# Altium PCB PCB1.PcbDoc
Units mm, origin at the board's own origin, x right, y up, seen from the top; angles counter-clockwise.
Board outline 70 x 50 mm, 2 copper layers (Top Layer, Bottom Layer); 22 components, 18 nets, 59 pads, 0 vias.
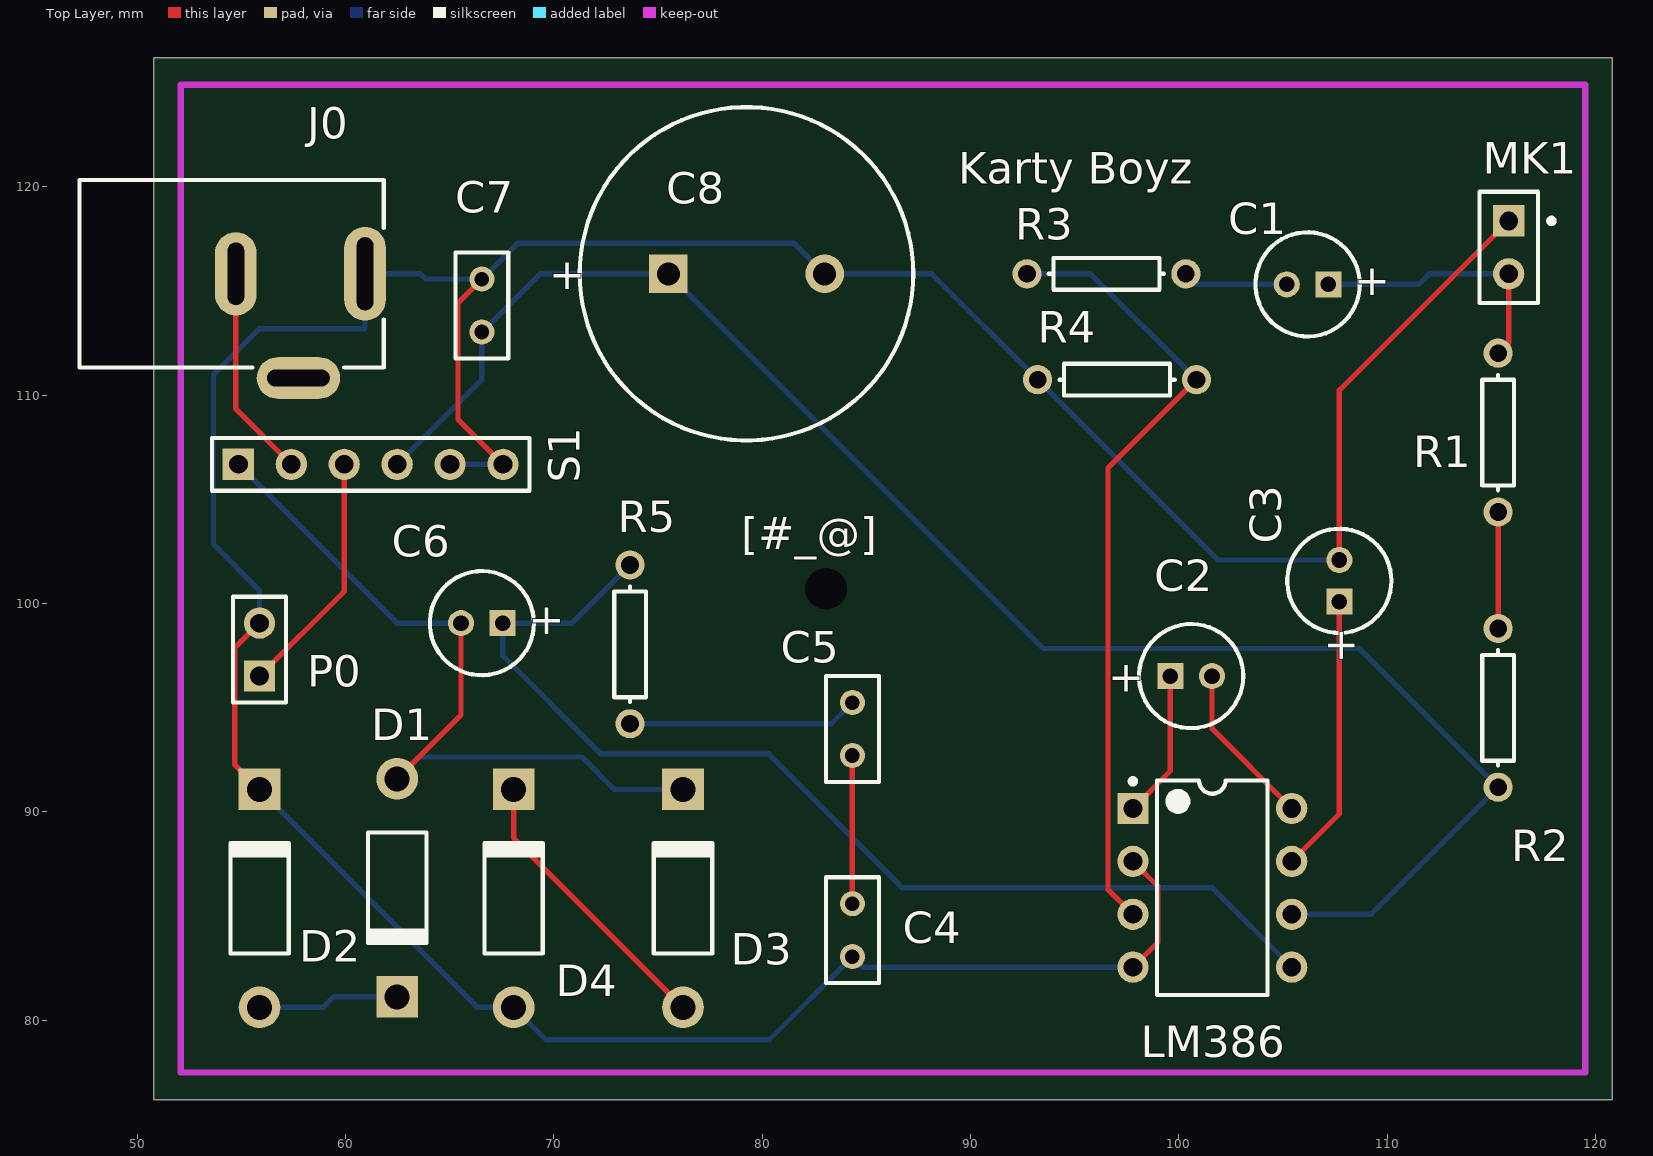
[diagram p0: Top Layer view]
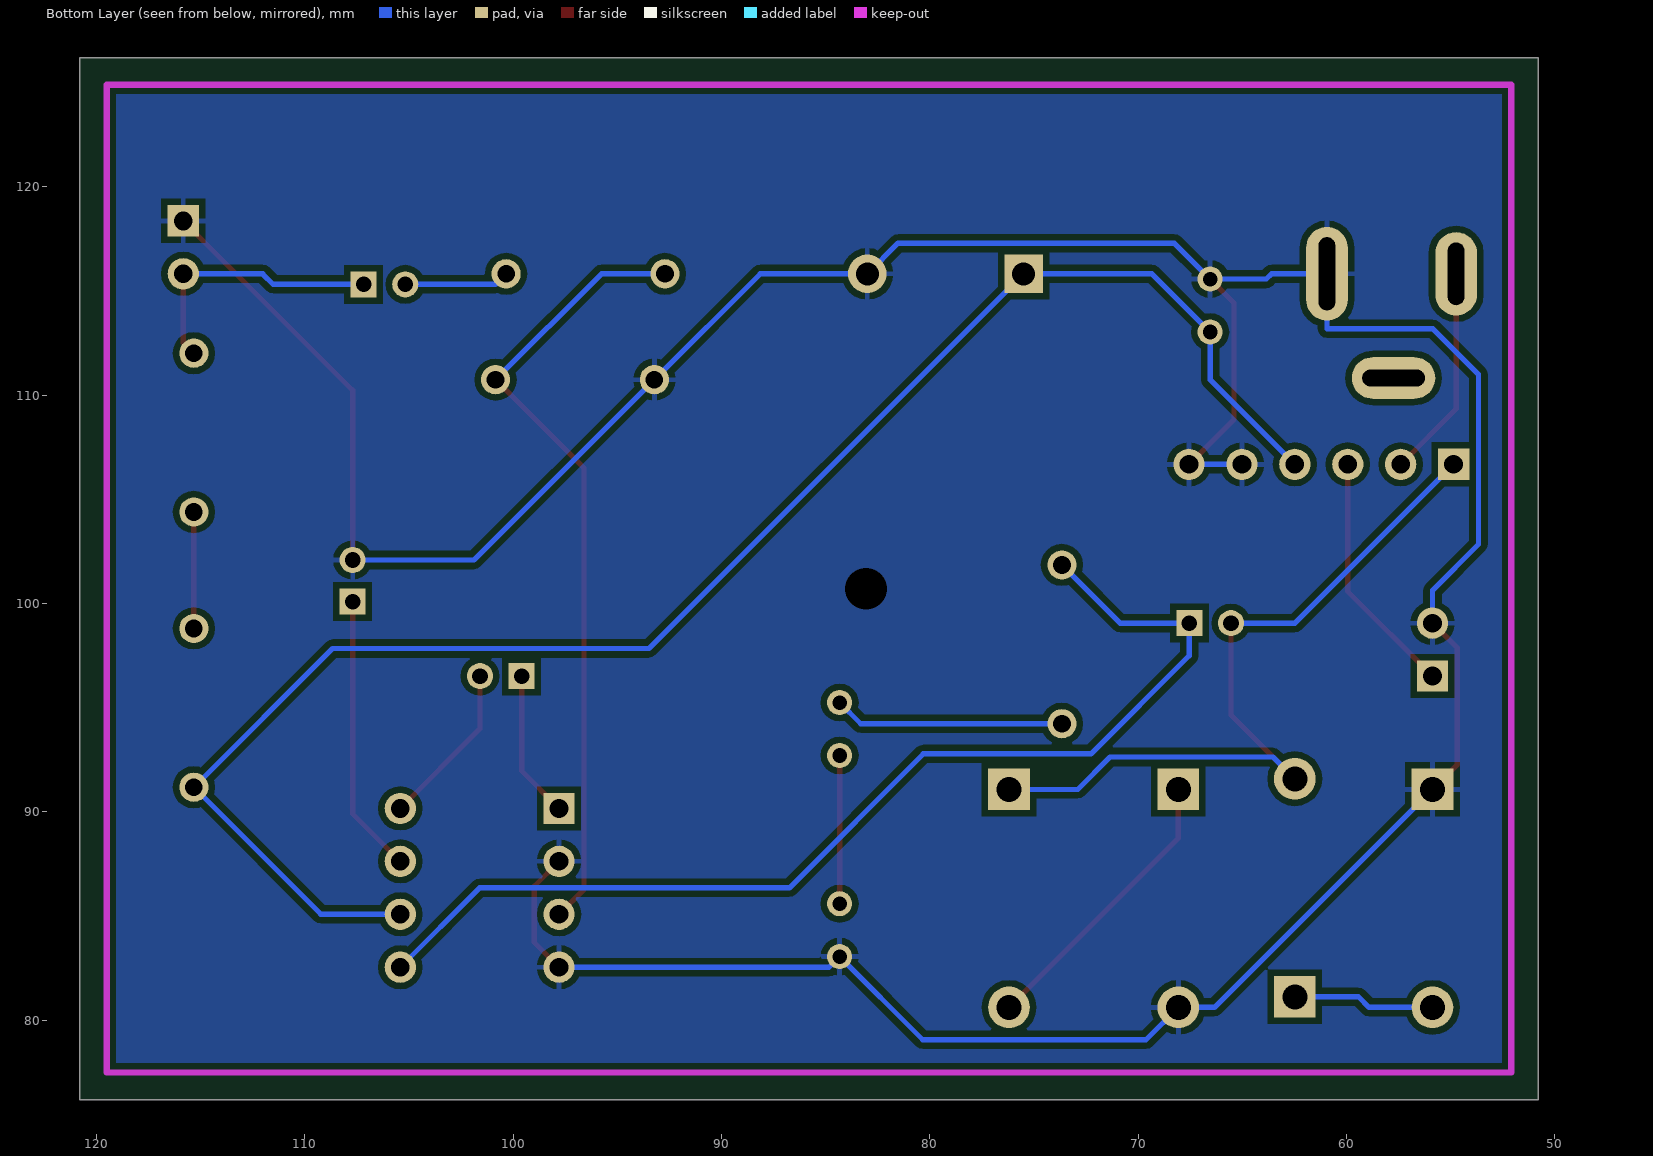
[diagram p1: Bottom Layer view, seen from below]

## Layer stack, top to bottom
Top Layer: signal copper 0.0356
Dielectric: core 0.32, FR-4, Dk 4.8
Bottom Layer: signal copper 0.0356

## Board outline
50.8,76.2 120.8,76.2 120.8,126.2 50.8,126.2

## Design rules (kind name [scope] priority, off if disabled: settings)
Clearance [All] p1: gap=0.3
PolygonConnect [All] p1: connectstyle=Relief reliefconductorwidth=0.254 reliefentries=4 polygonreliefangle="90 Angle"
RoutingVias [All] p1: holewidth=0.8 width=1.6 viastyle="Through Hole" minholewidth=0.711 minwidth=1.27 maxholewidth=0.711 maxwidth=1.27
SilkscreenOverComponentPads [All] p1: minsilkscreentomaskgap=0.254
SolderMaskExpansion [All] p1: expansion=0.102
Width Width_1 [All] p1: maxlimit=0.254 minlimit=0.254 preferedwidth=0.254
Width Width_pwr [(InNet('VCC') OR InNet('GND'))] p2: maxlimit=0.7 minlimit=0.3 preferedwidth=0.5 minimp=50.000000 maximp=50.000000 favimp=50.000000
27 further rules are at their usual default settings.

## Components (designator, comment, footprint, x,y, rotation, side; value= is the part's Value field where it differs from the comment)
C1 "" CAPPR2-5x6.8 106.172,115.316 r180 top
C2 "" CAPPR2-5x6.8 100.584,96.52 r0 top
C3 "" CAPPR2-5x6.8 107.696,101.092 r90 top
C4 "" RAD-0.1 84.328,84.328 r90 top
C5 "" RAD-0.1 84.328,93.98 r90 top
C6 "" CAPPR2-5x6.8 66.548,99.06 r180 top
C7 "" RAD-0.1 66.548,114.3 r270 top
C8 "" CAPPR7.5-16x35 79.248,115.824 r0 top
D1 "Diode 1N4007" DIO10.46-5.3x2.8 62.484,86.36 r270 top
D2 "Diode 1N4007" DIO10.46-5.3x2.8 55.88,85.852 r90 top
D3 "Diode 1N4007" DIO10.46-5.3x2.8 76.2,85.852 r90 top
D4 "Diode 1N4007" DIO10.46-5.3x2.8 68.072,85.852 r90 top
J0 "PWR2.1" KLD-0202 47.244,115.824 r0 top
LM386 "LM386N-3" N08E 101.6,86.36 r0 top (schematic designator MK1)
MK1 "Mic2" PIN2 115.824,118.364 r270 top (schematic designator P0)
P0 "OUTPUT" HDR1X2 55.88,96.52 r90 top (schematic designator R1)
R1 "" AXIAL-0.3 115.316,108.204 r270 top (schematic designator R2)
R2 "" AXIAL-0.3 115.316,94.996 r270 top (schematic designator R3)
R3 "" AXIAL-0.3 96.52,115.824 r0 top (schematic designator R4)
R4 "" AXIAL-0.3 97.028,110.744 r0 top (schematic designator R5)
R5 "" AXIAL-0.3 73.66,98.044 r90 top (schematic designator S1)
S1 "Header 6" HDR1X6 54.864,106.68 r0 top (schematic designator U?)

## Footprints (in the part's own frame and the unit in brackets; to place one, negate y for a bottom-side part, rotate by r counter-clockwise, add the part's x,y. Pads: shape width x height; smd on the part's side, far side on the other; paste and mask are expansions set on the pad)
AXIAL-0.3 [mm] "Axial Device, Thru-Hole; 2 Leads; 0.3 in Pin Spacing"
  round 1.4 hole 0.85: 1(-3.81,0) 2(3.81,0)
  silkscreen extent -2.77,-0.76 2.77,0.76
CAPPR2-5x6.8 [mm] "Capacitor, Electrolytic, Radial; Body 5 x 6.8 mm (Dia.xH typ); Pin Spacing 2 mm (typ)"
  rect 1.25x1.25 hole 0.75: 1(-1,0)
  round 1.25 hole 0.75: 2(1,0)
  silkscreen extent -2.5,-2.5 2.5,2.5
CAPPR7.5-16x35 [mm] "Capacitor, Electrolytic, Radial; Body 16 x 35 mm (Dia.xH typ); Pin Spacing 7.5 mm (typ)"
  rect 1.85x1.85 hole 1.1: 1(-3.75,0)
  round 1.85 hole 1.1: 2(3.75,0)
  silkscreen extent -8,-8 8,8
DIO10.46-5.3x2.8 [mm] "Diode, Axial; Body 5.2 x 2.7 mm (LxDia. max), Lead Dia. 0.86 mm (max)"
  round 2 hole 1.2: 1(-5.23,0)
  rect 2x2 hole 1.2: 2(5.23,0)
  silkscreen extent -2.65,-1.41 2.75,1.4
HDR1X2 [mm] "Connector; Header; 2 Position"
  rect 1.5x1.5 hole 0.9: 1(0,0)
  round 1.5 hole 0.9: 2(2.54,0)
  silkscreen extent -1.27,-1.27 3.81,1.27
HDR1X6 [mm] "Connector; Header; 6 Position"
  rect 1.5x1.5 hole 0.9: 1(0,0)
  round 1.5 hole 0.9: 2(2.54,0) 3(5.08,0) 4(7.62,0) 5(10.16,0) 6(12.7,0)
  silkscreen extent -1.27,-1.27 13.97,1.27
KLD-0202 [mm] "DC Power Jack, 2.5mm, KLD Series, PCB Mount"
  oval 2x4.5 all layers, no hole: 1(13.7,0)
  oval 1.5x4.5 hole 0.8 slot 3.5 at 90 deg: 1A(13.7,0)
  oval 2x4 all layers, no hole: 2(7.5,0)
  oval 1.5x4 hole 0.8 slot 3 at 90 deg: 2A(7.5,0)
  oval 4x2 all layers, no hole: 3(10.5,-5)
  oval 4x1.5 hole 0.8 slot 3 at 0 deg: 3A(10.5,-5)
  silkscreen extent 0,-4.5 14.6,4.5
N08E [mm] "DIP, 8-Leads, Row Spacing 7.62mm, Pitch 2.54mm, Body 9.91x6.35mm"
  rect 1.5x1.5 hole 0.9: 1(-3.81,3.81)
  round 1.5 hole 0.9: 2(-3.81,1.27) 3(-3.81,-1.27) 4(-3.81,-3.81) 5(3.81,-3.81) 6(3.81,-1.27) 7(3.81,1.27) 8(3.81,3.81)
  silkscreen extent -3.93,-5.15 2.65,5.23, body extent -3.6,-5.15 3.6,5.15, height 5.34
PIN2 [mm] "Photosensitive Diode; 2 Leads"
  rect 1.5x1.5 hole 0.9: 1(0,0)
  round 1.5 hole 0.9: 2(2.54,0)
  silkscreen extent -1.4,-1.4 3.94,2.18
RAD-0.1 [mm] "Radial Cap, Thru-Hole; 2 Leads; 0.1 in Pin Spacing"
  round 1.2 hole 0.7: 1(-1.27,0) 2(1.27,0)
  silkscreen extent -2.54,-1.27 2.54,1.27

## Part data
C1 C2 C3 C6 C8: library part "Cap Pol1", "Polarized Capacitor (Radial)"
C4 C5 C7: library part Cap, "Capacitor"
D1 D2 D3 D4: "1 Amp General Purpose Rectifier"
J0: library part PWR2.5, "Low Voltage Power Supply Connector"
LM386: library part Mic2, "Microphone"
MK1: library part "Header 2", "Header, 2-Pin"
P0 R1 R2 R3 R4: library part Res1, "Resistor"
R5: library part "Header 6", "Header, 6-Pin"
S1: library part LM386N-3, "Low Voltage Audio Power Amplifier, 8-pin MDIP"

## Free pads (board coordinates)
  round 1 hole 2 unplated: 1(83.058,100.711)

## Nets (pads, with @x,y where several pads share a name; then routed paths per layer and width w, separated by ;. In a path a pad name is that pad's centre, name@x,y a point inside that pad or via, vN(x,y) a via of type N, cw(c..) or ccw(c..) an arc to the next point about the centre after c; other vN are vias at no path point)
GND: C3.2 C4.1 C7.1 C8.2 D2.2 D4.1 J0.1 J0.1A LM386.2 LM386.4 MK1.1 P0.2 pad.1 R4.1 S1.5 S1.6 | length 173.8
  Top Layer w0.254: D2.2 54.686,92.276 54.686,97.866 P0.2 ; C7.1 65.405,114.427 65.405,108.839 S1.6 ; LM386.4 98.984,83.744 98.984,86.436 LM386.2 ; C3.2 107.696,110.236 MK1.1
  Bottom Layer w0.254: D2.2 66.34,80.622 D4.1 69.624,79.07 80.34,79.07 C4.1 84.836,82.55 LM386.4 ; P0.2 55.88,100.635 53.67,102.845 53.67,110.998 55.855,113.182 60.944,113.182 J0.1 63.602,115.824 63.856,115.57 C7.1 68.275,117.297 81.525,117.297 C8.2 88.138,115.824 R4.1 101.87,102.092 C3.2 ; S1.5 S1.6
NetC1_1: C1.1 MK1.2 R1.1 | length 12.9
  Top Layer w0.254: R1.1 115.824,112.522 MK1.2
  Bottom Layer w0.254: C1.1 111.506,115.316 112.014,115.824 MK1.2
NetC1_2: C1.2 R3.2 | length 5.1
  Bottom Layer w0.254: R3.2 100.838,115.316 C1.2
NetC2_1: C2.1 LM386.1 | length 7.1
  Top Layer w0.254: LM386.1 99.584,91.964 C2.1
NetC2_2: C2.2 LM386.8 | length 7.9
  Top Layer w0.254: C2.2 101.584,93.996 LM386.8
NetC3_1: C3.1 LM386.7 | length 13.4
  Top Layer w0.254: LM386.7 107.696,89.916 C3.1
NetC4_2: C4.2 C5.1 | length 7.1
  Top Layer w0.254: C4.2 C5.1
NetC5_2: C5.2 R5.1 | length 11.1
  Bottom Layer w0.254: R5.1 83.312,94.234 C5.2
NetC6_1: C6.1 LM386.5 R5.2 | length 52.9
  Bottom Layer w0.254: R5.2 70.866,99.06 C6.1 67.548,97.501 72.263,92.786 80.315,92.786 86.741,86.36 101.6,86.36 LM386.5
NetC6_2: C6.2 D1.1 D3.2 S1.1 | length 37.4
  Top Layer w0.254: D1.1 65.548,94.654 C6.2
  Bottom Layer w0.254: S1.1 62.484,99.06 C6.2 ; D1.1 63.528,92.634 71.349,92.634 72.9,91.082 D3.2
NetD1_2: D1.2 D2.1 | length 6.8
  Bottom Layer w0.254: D2.1 58.928,80.622 59.436,81.13 D1.2
NetD3_1: D3.1 D4.2 | length 13.8
  Top Layer w0.254: D4.2 68.072,88.75 D3.1
NetJ0_2: J0.2 J0.2A S1.2 | length 10.2
  Top Layer w0.254: J0.2 54.744,109.34 S1.2
NetJ0_3: J0.3 J0.3A
NetP0_1: P0.1 S1.3 | length 11.8
  Top Layer w0.254: P0.1 59.944,100.584 S1.3
NetR1_2: R1.2 R2.1 | length 5.6
  Top Layer w0.254: R2.1 R1.2
NetR3_1: LM386.3 R3.1 R4.2 | length 38.1
  Top Layer w0.254: LM386.3 96.596,86.284 96.596,106.502 R4.2
  Bottom Layer w0.254: R3.1 95.758,115.824 R4.2
VCC: C7.2 C8.1 LM386.6 R2.2 S1.4 | length 80.6
  Bottom Layer w0.254: S1.4 66.548,110.744 C7.2 69.342,115.824 C8.1 93.481,97.841 108.661,97.841 R2.2 109.22,85.09 LM386.6

## Polygon pours and split planes (outlines as drawn)
GND on Bottom Layer "GND" (solid, pour order 1000): 52.324,124.9 52.324,77.724 119.5,77.724 119.5,124.9

## Keep-outs
Keep-Out Layer:
  lines w0.3: 52.1,77.5 52.1,124.9 119.5,124.9 119.5,77.5 52.1,77.5

## Silkscreen, mask and mechanical layers (free items; w line width, h text height)
Top Overlay:
  text "Karty Boyz" at 89.408,120.142 h1.52
  text "[#_@]" at 78.994,102.616 h1.52

## Text inside footprints (layer, text, board x,y; h text height)
C1: Top Overlay "+" at 110.147,116.066 h1.5 r180
C2: Top Overlay "+" at 96.609,95.77 h1.5
C3: Top Overlay "+" at 108.446,97.117 h1.5 r90
C6: Top Overlay "+" at 70.523,99.81 h1.5 r180
C8: Top Overlay "+" at 69.773,115.074 h1.5
J0: Mechanical 1 "Mech 2 - Clearance, move to internal plane if present" at 47.53,120.89 h0.3; Mechanical 1 "Mech 1 - Slot cut-out" at 47.53,121.39 h0.3; Mechanical 1 "Assign keep-out area to slot" at 47.53,122.39 h0.3; Mechanical 1 "Alert PCB fab to slot details" at 47.53,121.89 h0.3